# EAGLE board Board (EAGLE 9.6.2)
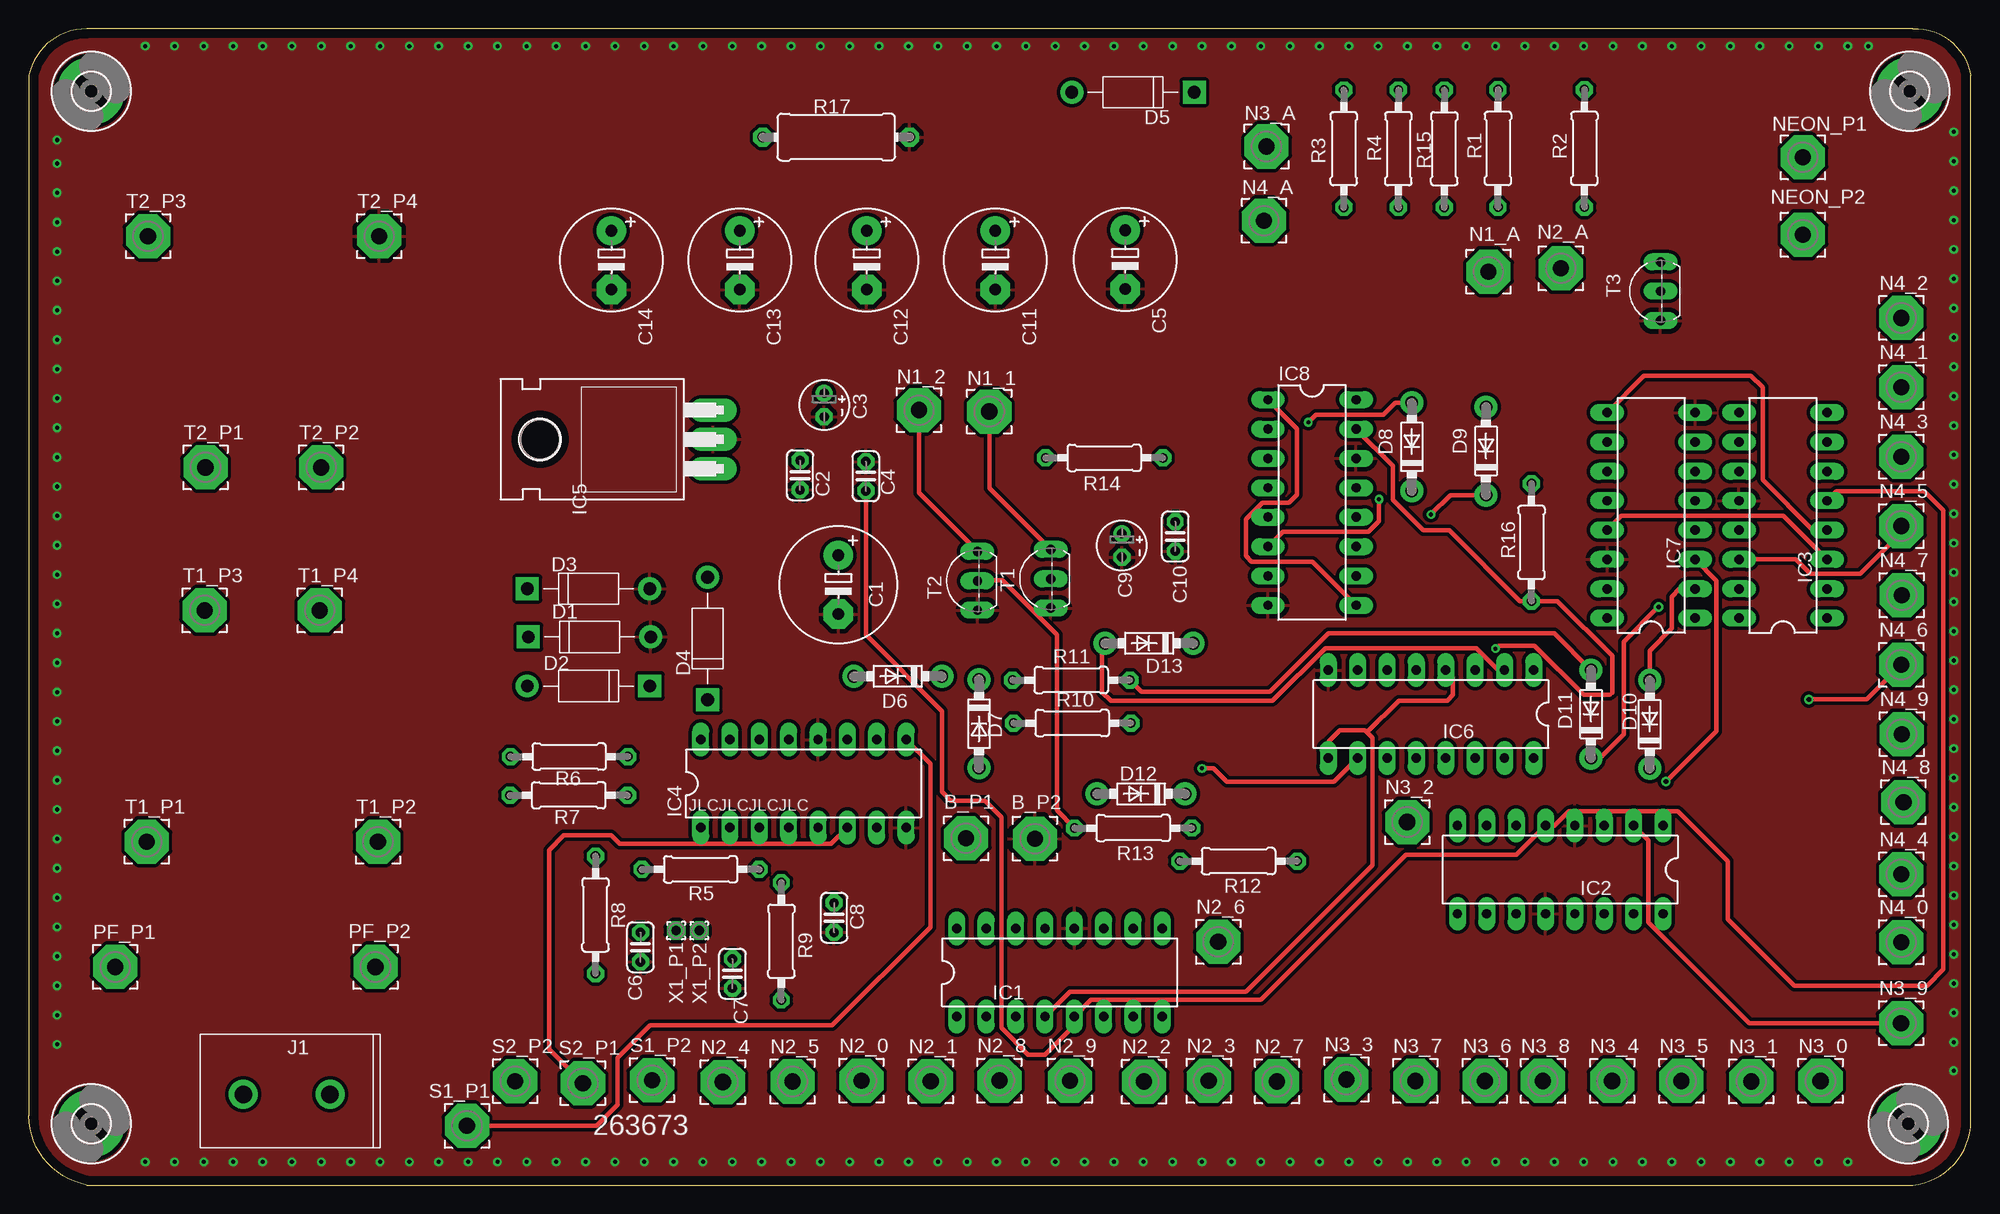
[diagram p0: board, top side]
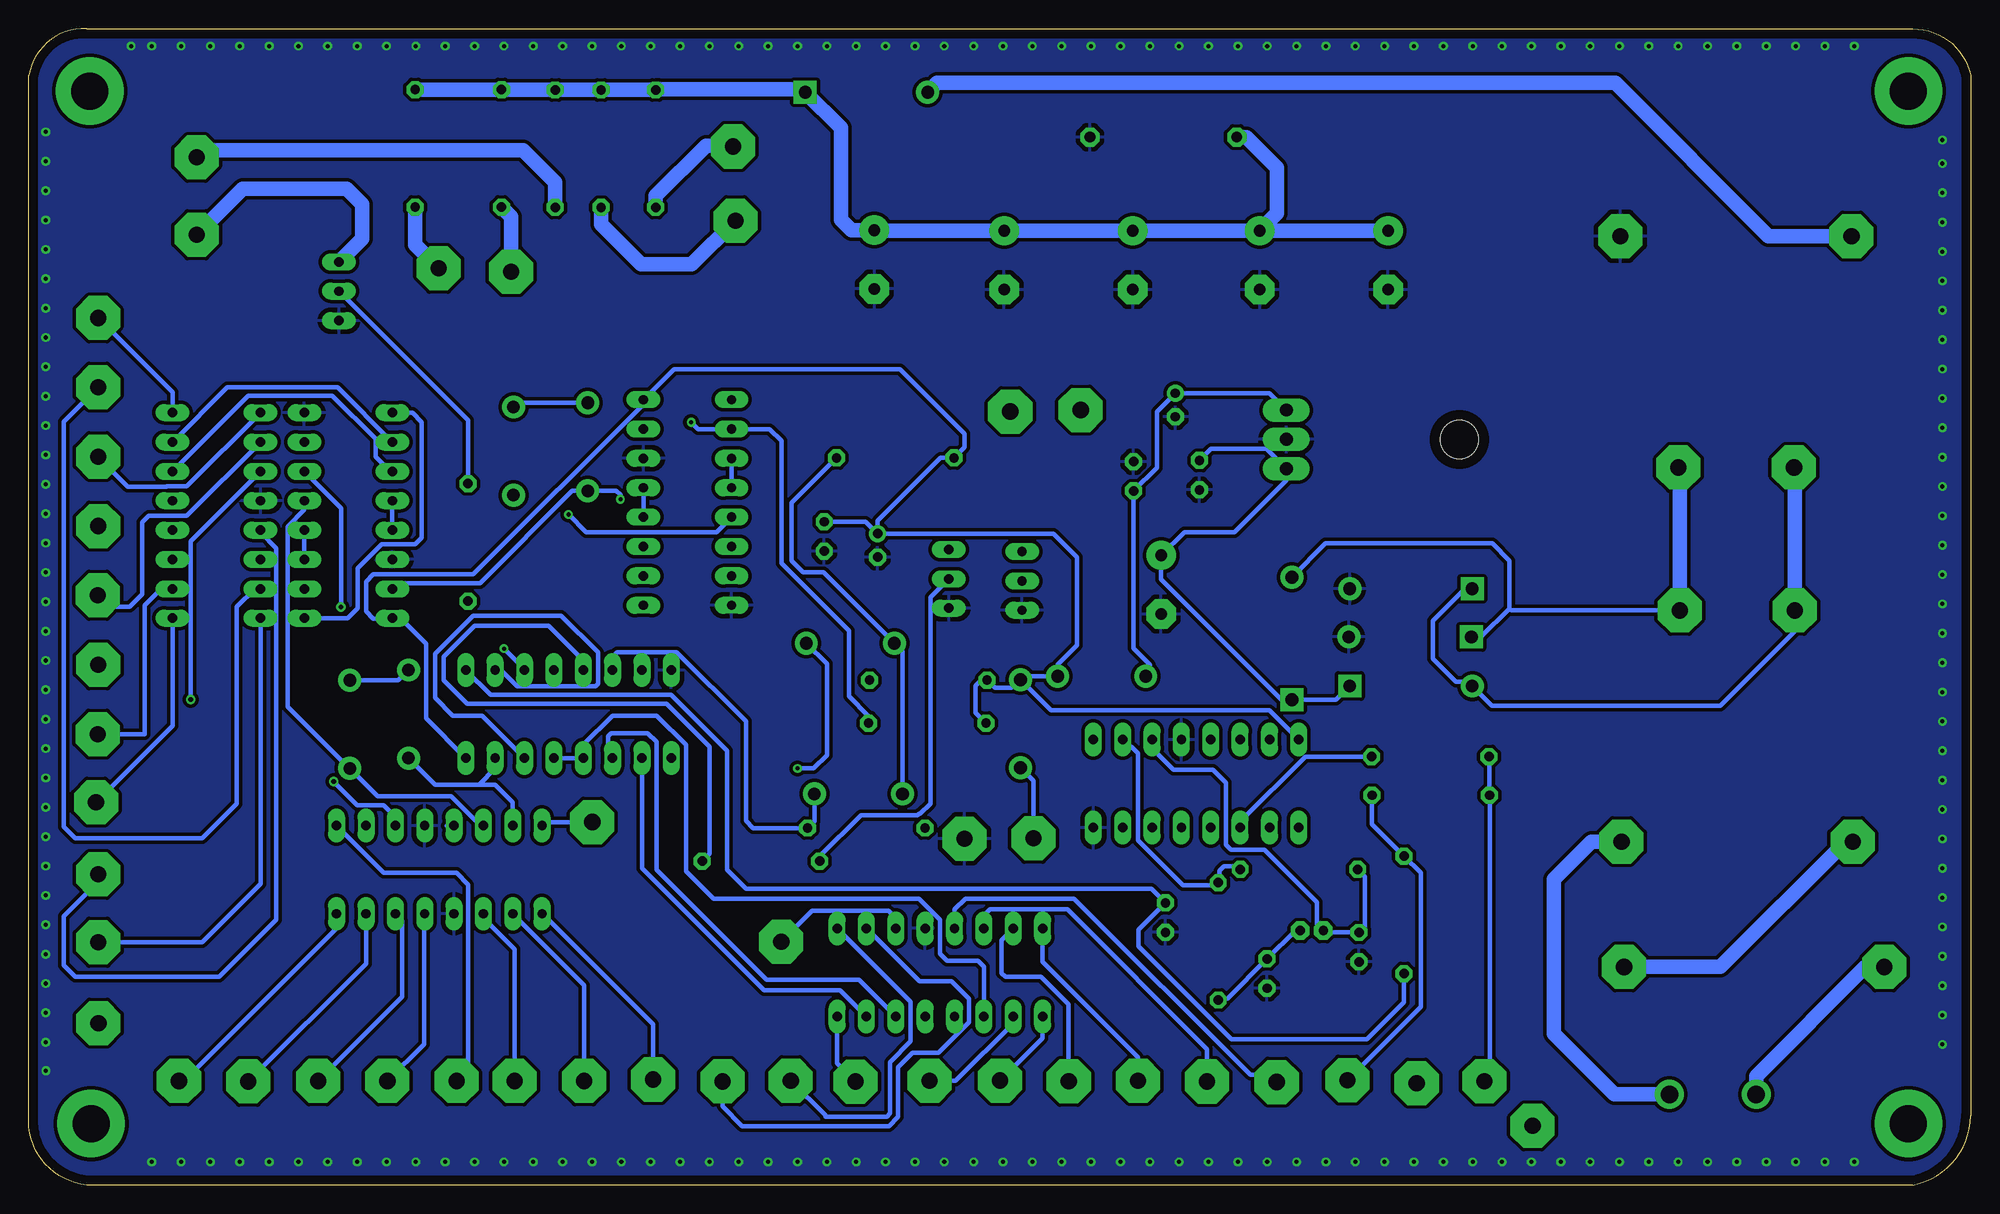
[diagram p1: board, bottom side, seen from below]

Size 168 x 100 mm. Coordinates in mm from the lower left corner, seen from the top.
Outline: 5,0 163,0 arc79 168,5 168,96 arc84 163,100 5,100 arc79 0,96 0,6 arc79 5,0
Copper layers (1*16): Top 0.035mm / dielectric 1.5mm / Bottom 0.035mm
Design rules "default *": minimum track width 16mil, minimum drill 0.35mm, track to track 12mil, track to pad 12mil, pad to pad 12mil, via to via 12mil, smd to smd 6mil, copper to edge 32mil, drill to drill 6mil, minimum pad ring 10mil, minimum via ring 8mil, stop-mask expansion 4mil, vias tented up to drill 0mil, thermal gap 16mil
Net classes: 1 HV: clearance 2 mm

## Footprints (pad centres in the part's own frame; a part is rotated, then mirrored left to right if it is on the bottom)
3,81/1,4 = drill 1.397 pad 3.81 octagon: 1 0,0
E5-10,5 = drill 1.016 pad 2.54: + -2.54,0 | drill 1.016 pad 2.54 octagon: - 2.54,0
C025-024X044 = drill 0.813 octagon: 1 -1.27,0; 2 1.27,0
E2-4 = drill 0.813 pad 1.27: + -1.016,0 | drill 0.813 pad 1.27 octagon: - 1.016,0
E5-8,5 = drill 1.016 pad 2.54: + -2.54,0 | drill 1.016 pad 2.54 octagon: - 2.54,0
DIOAD1060W80L520D270 = drill 1.1 pad 1.65: A 5.3,0 | drill 1.1 pad 1.65 square: C -5.3,0
DO41-7.6 = drill 1.1 pad 1.7: A 3.81,0; C -3.81,0
3,2-PAD = drill 3.2 pad 5.842: B3,2 0,0
DIL16 = drill 0.813 long: 1 -8.89,-3.81; 2 -6.35,-3.81; 3 -3.81,-3.81; 4 -1.27,-3.81; 5 1.27,-3.81; 6 3.81,-3.81; 7 6.35,-3.81; 8 8.89,-3.81; 9 8.89,3.81; 10 6.35,3.81; 11 3.81,3.81; 12 1.27,3.81; 13 -1.27,3.81; 14 -3.81,3.81; 15 -6.35,3.81; 16 -8.89,3.81
TO220H = drill 1.118 long: 1 -2.54,-10.16; 2 0,-10.16; 3 2.54,-10.16 | hole 3.302: 0,4.826
691216910002 = drill 1.5: 1 -3.75,0; 2 3.75,0
0207/10 = drill 0.813 octagon: 1 -5.08,0; 2 5.08,0
0411/12 = drill 0.914 octagon: 1 -6.35,0; 2 6.35,0
TO92-EBC = drill 0.813 long: B 0,-1.27; C 2.54,-1.27; E -2.54,-1.27
1,6/0,8 = drill 0.813 pad 1.6 octagon: 1 0,0

## Placement (x,y rotation side)
B_P1  [3,81/1,4]  81.09,29.99 0 top
B_P2  [3,81/1,4]  87.05,29.96 0 top
C1  680u/35V  [E5-10,5]  70.03,51.93 270 top
C2  100n/35V  [C025-024X044]  66.72,61.41 270 top
C3  100u  [E2-4]  68.81,67.47 270 top
C4  100n  [C025-024X044]  72.42,61.31 90 top
C5  4.7u/450V  [E5-8,5]  94.85,80.05 270 top
C6  18p  [C025-024X044]  52.91,20.57 270 top
C7  18p  [C025-024X044]  60.88,18.29 270 top
C8  1n  [C025-024X044]  69.66,23.13 270 top
C9  100u  [E2-4]  94.56,55.33 270 top
C10  100n  [C025-024X044]  99.18,56.1 270 top
C11  4.7u/450V  [E5-8,5]  83.62,80 270 top
C12  4.7u/450V  [E5-8,5]  72.49,80 270 top
C13  4.7u/450V  [E5-8,5]  61.51,80 270 top
C14  4.7u/450V  [E5-8,5]  50.4,80 270 top
D1  1N4007  [DIOAD1060W80L520D270]  48.5,47.41 0 top
D2  1N4007  [DIOAD1060W80L520D270]  48.42,43.16 180 top
D3  1N4007  [DIOAD1060W80L520D270]  48.42,51.57 0 top
D4  1N4007  [DIOAD1060W80L520D270]  58.73,47.28 90 top
D5  1N4007  [DIOAD1060W80L520D270]  95.53,94.52 180 top
D6  1N5819  [DO41-7.6]  75.18,44 180 top
D7  1N5819  [DO41-7.6]  82.2,39.9 270 top
D8  1N5819  [DO41-7.6]  119.65,63.85 90 top
D9  1N5819  [DO41-7.6]  126.07,63.49 90 top
D10  1N5819  [DO41-7.6]  140.24,39.85 90 top
D11  1N5819  [DO41-7.6]  135.16,40.73 90 top
D12  1N5819  [DO41-7.6]  96.23,33.83 180 top
D13  1N5819  [DO41-7.6]  96.93,46.85 180 top
H1  3.2  [3,2-PAD]  5.38,94.62 0 top
H2  3.2  [3,2-PAD]  162.74,94.62 0 top
H3  3.2  [3,2-PAD]  162.61,5.3 0 top
H4  3.2  [3,2-PAD]  5.38,5.3 0 top
IC1  74141N  [DIL16]  89.18,18.38 0 top
IC2  74141N  [DIL16]  132.49,27.27 180 top
IC3  74141N  [DIL16]  151.76,57.92 90 top
IC4  4060N  [DIL16]  67.01,34.72 0 top
IC5  7805T  [TO220H]  49.05,64.5 90 top
IC6  74HC390N  [DIL16]  121.31,40.73 180 top
IC7  74HC390N  [DIL16]  140.36,57.92 90 top
IC8  74HC390N  [DIL16]  111.01,59.04 270 top
J1  [691216910002]  22.3,7.84 0 top
N1_1  [3,81/1,4]  83.09,66.91 0 top
N1_2  [3,81/1,4]  77,67.03 0 top
N1_A  [3,81/1,4]  126.28,79.01 0 top
N2_0  [3,81/1,4]  72.03,9.03 0 top
N2_1  [3,81/1,4]  78.03,8.97 0 top
N2_2  [3,81/1,4]  96.49,8.95 0 top
N2_3  [3,81/1,4]  102.08,9.02 0 top
N2_4  [3,81/1,4]  60.04,8.9 0 top
N2_5  [3,81/1,4]  66.06,8.95 0 top
N2_6  [3,81/1,4]  102.91,21.04 0 top
N2_7  [3,81/1,4]  107.98,8.96 0 top
N2_8  [3,81/1,4]  83.97,9.04 0 top
N2_9  [3,81/1,4]  90.06,9.02 0 top
N2_A  [3,81/1,4]  132.54,79.29 0 top
N3_0  [3,81/1,4]  155.02,9 0 top
N3_1  [3,81/1,4]  149.02,8.96 0 top
N3_2  [3,81/1,4]  119.25,31.4 0 top
N3_3  [3,81/1,4]  114,9.13 0 top
N3_4  [3,81/1,4]  136.98,9 0 top
N3_5  [3,81/1,4]  142.98,9 0 top
N3_6  [3,81/1,4]  125.97,9 0 top
N3_7  [3,81/1,4]  119.95,9 0 top
N3_8  [3,81/1,4]  131,9 0 top
N3_9  [3,81/1,4]  161.98,14 0 top
N3_A  [3,81/1,4]  107.08,89.83 0 top
N4_0  [3,81/1,4]  162,21 0 top
N4_1  [3,81/1,4]  162.02,69.02 0 top
N4_2  [3,81/1,4]  162.02,75 0 top
N4_3  [3,81/1,4]  162.02,63 0 top
N4_4  [3,81/1,4]  162.02,26.87 0 top
N4_5  [3,81/1,4]  162,57 0 top
N4_6  [3,81/1,4]  162,45 0 top
N4_7  [3,81/1,4]  162.03,51.02 0 top
N4_8  [3,81/1,4]  162.19,33.11 0 top
N4_9  [3,81/1,4]  162.05,39 0 top
N4_A  [3,81/1,4]  106.87,83.41 0 top
NEON_P1  [3,81/1,4]  153.49,88.9 0 top
NEON_P2  [3,81/1,4]  153.49,82.2 0 top
PF_P1  [3,81/1,4]  7.46,18.86 0 top
PF_P2  [3,81/1,4]  29.98,18.86 0 top
R1  82k/1W  [0207/10]  127.11,89.67 90 top
R2  82k/1W  [0207/10]  134.58,89.67 90 top
R3  82k/1W  [0207/10]  113.76,89.64 90 top
R4  82k/1W  [0207/10]  118.49,89.64 90 top
R5  10M  [0207/10]  58.11,27.31 180 top
R6  10k  [0207/10]  46.74,37.06 180 top
R7  10k  [0207/10]  46.7,33.71 0 top
R8  1k  [0207/10]  49.02,23.37 270 top
R9  100k  [0207/10]  65.1,21.08 270 top
R10  470k  [0207/10]  90.27,39.96 180 top
R11  470k  [0207/10]  90.18,43.67 180 top
R12  13k  [0207/10]  104.66,28.02 180 top
R13  13k  [0207/10]  95.55,30.88 180 top
R14  470k  [0207/10]  93.04,62.9 180 top
R15  470k/1W  [0207/10]  122.46,89.64 270 top
R16  48.7k  [0207/10]  130,55.59 90 top
R17  82k/3W  [0411/12]  69.85,90.64 180 top
S1_P1  [3,81/1,4]  37.9,5.11 0 top
S1_P2  [3,81/1,4]  53.92,9.07 0 top
S2_P1  [3,81/1,4]  47.93,8.81 0 top
S2_P2  [3,81/1,4]  42.07,8.99 0 top
T1  MPSA42  [TO92-EBC]  87.13,52.44 90 top
T1_P1  [3,81/1,4]  10.2,29.7 0 top
T1_P2  [3,81/1,4]  30.2,29.7 0 top
T1_P3  [3,81/1,4]  15.2,49.7 0 top
T1_P4  [3,81/1,4]  25.16,49.7 0 top
T2  MPSA42  [TO92-EBC]  80.8,52.26 90 top
T2_P1  [3,81/1,4]  15.28,62.07 0 top
T2_P2  [3,81/1,4]  25.28,62.07 0 top
T2_P3  [3,81/1,4]  10.3,82.08 0 top
T2_P4  [3,81/1,4]  30.31,82.08 0 top
T3  MPSA42  [TO92-EBC]  139.91,77.31 90 top
X1_P1  [1,6/0,8]  56,22 0 top
X1_P2  [1,6/0,8]  58,22 0 top

## Library data of the parts
B_P1 B_P2 N1_1 N1_2 N1_A N2_0 N2_1-N2_9 N2_A N3_0 N3_1-N3_9 N3_A N4_0 N4_1-N4_9 N4_A NEON_P1 NEON_P2 PF_P1 PF_P2 S1_P1 S1_P2 S2_P1 S2_P2 T1_P1-T1_P4 T2_P1-T2_P4 X1_P1 X1_P2 = wirepad
C1-C14 = rcl; SPICEPREFIX: C
D1-D5 = 1N4007; AVAILABILITY: In Stock; DESCRIPTION: Diode Standard 1000 V 1A Through Hole DO-41/DO-204AC; MF: Diotec Semiconductor; MP: 1N4007; PACKAGE: DO-41-2 Diotec; PRICE: None; PURCHASE-URL: https://pricing.snapeda.com/search/part/1N4007/?ref=eda
D6-D13 = diode
H1-H4 = holes
IC1-IC3 = 74xx-us
IC4 = 40xx
IC5 = linear
IC6-IC8 = 74xx-eu
J1 = ak750; AVAILABILITY: In Stock; DESCRIPTION: 2 Position Wire to Board Terminal Block Horizontal with Board 0.295 (7.50mm) Through Hole; MF: Wurth Electronics; MP: 691216910002; PACKAGE: None; PRICE: None
R1-R17 = rcl; SPICEPREFIX: R
T1-T3 = transistor

## Nets
0_1: IC1.16 N2_0.1
0_2: IC2.16 N3_0.1
0_3: IC3.16 N4_0.1
A1: C8.1 IC6.1 R8.2
IC1_P3: IC1.3 IC6.12 IC6.13
IC1_P4: IC1.4 IC6.4 IC6.9
IC1_P6: IC1.6 IC6.11
IC1_P7: D13.C IC1.7 IC6.10
IC2_P3: IC2.3 IC7.3 IC7.4
IC2_P6: D10.C IC2.6 IC7.5
IC2_P7: D11.C IC2.7 IC6.15 IC7.6
IC3_P3: IC3.3 IC7.12 IC7.13
IC3_P4: IC3.4 IC7.1 IC7.9
IC3_P6: IC3.6 IC7.11
IC3_P7: IC3.7 IC7.10
IC4_P10: IC4.10 R5.1 R9.1
IC4_P11: C6.1 IC4.11 R5.2 X1_P1.1
IC6_P3: IC6.3 IC8.15 R16.1
IC8_P3: IC8.3 IC8.4
IC8_P9: IC8.1 IC8.9
IC8_P13: IC8.12 IC8.13
MGND: B_P2.1 C1.- C2.2 C3.- C4.2 C5.- C6.2 C7.2 C8.2 C9.- C10.2 C11.- C12.- C13.- C14.- D1.A D3.A IC1.12 IC2.4 IC2.12 IC3.12 IC4.8 IC4.12 IC5.2 IC6.8 IC7.8 IC7.14 IC8.8 IC8.14 R17.1 T1.E T2.E T2_P4.1 T3.E
N$1 [HV]: J1.1 PF_P1.1
N$2 [HV]: J1.2 T1_P2.1
N$3 [HV]: D5.A T2_P3.1
N$4 [HV]: C5.+ C11.+ C12.+ C13.+ C14.+ D5.C R1.2 R2.2 R3.2 R4.2 R15.1 R17.2
N$5 [HV]: N2_A.1 R2.1
N$6 [HV]: N3_A.1 R3.1
N$7 [HV]: N4_A.1 R4.1
N$8 [HV]: N1_A.1 R1.1
N$9: IC4.9 S1_P1.1
N$10: IC4.6 S2_P1.1
N$11: IC4.3 R6.1
N$12: R6.2 R7.1 S2_P2.1
N$13: R7.2 R8.1 S1_P2.1
N$14: D12.A D13.A IC6.2 IC6.14 R14.1
N$15: IC1.15 N2_1.1
N$16: C1.+ C2.1 D2.C D4.C IC5.1
N$17: B_P1.1 D7.A
N$18: IC1.8 N2_2.1
N$19: IC1.9 N2_3.1
N$20: IC1.13 N2_4.1
N$21: IC1.14 N2_5.1
N$22: IC1.11 N2_6.1
N$23: IC1.10 N2_7.1
N$24: IC1.1 N2_8.1
N$25: IC1.2 N2_9.1
N$26: IC2.15 N3_1.1
N$27: IC2.8 N3_2.1
N$28: IC2.9 N3_3.1
N$29: IC2.13 N3_4.1
N$30: IC2.14 N3_5.1
N$31: IC2.11 N3_6.1
N$32: IC2.10 N3_7.1
N$33: IC2.1 N3_8.1
N$34: IC2.2 N3_9.1
N$35: IC3.15 N4_1.1
N$36: IC3.8 N4_2.1
N$37: IC3.9 N4_3.1
N$38: IC3.13 N4_4.1
N$39: IC3.14 N4_5.1
N$40: IC3.11 N4_6.1
N$41: IC3.10 N4_7.1
N$42: IC3.1 N4_8.1
N$43: IC3.2 N4_9.1
N$44: C7.1 R9.2 X1_P2.1
N$45: R13.2 T2.B
N$46: D8.A D9.A IC8.2 R10.1
N$47: D8.C IC7.15 IC8.6
N$48: D9.C IC8.5
N$49: D10.A D11.A IC7.2 R11.1
N$50: N1_1.1 T1.C
N$51: N1_2.1 T2.C
N$52 [HV]: NEON_P1.1 R15.2
N$53 [HV]: NEON_P2.1 T3.C
N$54: R16.2 T3.B
N$55: R12.2 T1.B
N$56 [HV]: PF_P2.1 T1_P1.1
T1_B: D12.C IC6.6 R13.1
T2_B: IC6.5 R12.1
VCC74: C3.+ C4.1 D6.A IC1.5 IC2.5 IC3.5 IC5.3
VCCS: C9.+ C10.1 D6.C D7.C IC4.16 IC6.16 IC7.16 IC8.16 R10.2 R11.2 R14.2
VG1 [HV]: D1.C D4.A T1_P4.1 T2_P2.1
VG2 [HV]: D2.A D3.C T1_P3.1 T2_P1.1

## Tracks (layer width: path | path; a pad name or v marks a point on that pad's centre or on a via)
0_1
  Bottom 0.406: IC1.16 80.29,19.3 72.03,11.04 N2_0.1
0_2
  Bottom 0.406: IC2.16 141.38,22.19 154.57,9 N3_0.1
0_3
  Bottom 0.406: IC3.16 147.95,26.05 153,21 N4_0.1
A1
  Bottom 0.406: IC6.1 128.04,42.39 112.42,42.39 107.6,37.56 107.6,27.29 105.93,25.62 70.89,25.62 C8.1 72,22.06 72,20.65 63.96,12.61 52.22,12.61 49.02,15.81 R8.2
IC1_P3
  Bottom 0.406: IC6.13 IC6.12 120.04,38.07 117.5,40.61 113.69,40.61 111.15,38.07 111.15,27.15 108.76,24.76 90.99,24.76 89.18,22.95 89.18,20 88.58,19.4 85.88,19.4 85.37,18.89 IC1.3
IC1_P4
  Top 0.406: IC1.4 90.07,16.73 105.29,16.73 116.23,27.67 116.23,38.7 115.79,39.15 | 115.79,39.15 115.6,39.34 113.44,39.34 112.42,38.32 IC6.9 | 115.79,39.15 118.52,41.88 122.71,41.88 123.22,42.39 123.22,43.91 IC6.4
IC1_P6
  Bottom 0.406: IC6.11 117.88,37.31 117.88,38.83 117.63,39.08 114.45,39.08 113.69,38.32 113.69,27.27 104.17,17.75 96.17,17.75 IC1.6
IC1_P7  (via drill 0.35)
  Top 0.406: v101.5,36.04 102.5,36.04 103.65,34.89 112.93,34.89 IC6.10
  Bottom 0.406: IC1.7 97.82,16.86 104.41,16.86 114.96,27.42 IC6.10 | v101.5,36.04 100.1,36.04 98.96,37.18 98.96,45.07 D13.C
IC2_P3  (via drill 0.4)
  Top 0.406: v141.63,34.89 146,39.26 146,52.28 IC7.3
  Bottom 0.406: IC2.3 136.3,31.84 137.31,32.86 139.6,32.86 v141.63,34.89 | IC7.3 IC7.4
IC2_P6
  Bottom 0.406: IC2.6 128.93,31.08 131.47,33.62 137.82,33.62 D10.C | D10.C 140.27,36 | IC7.5 144.17,58.4 145.62,56.95 145.62,41.37 140.54,36.29 140.54,36.34 D10.C
IC2_P7  (via drill 0.4)
  Top 0.406: v141,50 138,47 138,39 135.93,36.92 D11.C
  Bottom 0.406: D11.C 132.87,34.64 129.06,34.64 | 129.06,34.64 127.66,36.04 IC6.15 | 129.06,34.64 127.66,34.64 126.14,33.11 IC2.7 | IC7.6 141,58.56 v141,50
IC3_P3
  Top 0.406: IC3.3 151.79,57.89 143.66,57.89 143.65,57.88 137.78,57.88 IC7.13
  Bottom 0.406: IC7.13 IC7.12
IC3_P4
  Top 0.406: IC7.9 139.74,70 149,70 150,69 150,61 154.35,56.65 IC3.4
  Bottom 0.406: IC7.9 134.81,66.81 134,66 134,55.99 134.58,55.41 137.5,55.41 139.55,53.36 139.55,49.88 140.4,49.03 IC7.1
IC3_P6
  Bottom 0.406: IC3.6 149.01,68.29 141.75,68.29 138,64.53 138,63 136.73,61.73 IC7.11
IC3_P7
  Bottom 0.406: IC3.7 150.84,69 141.28,69 IC7.10
IC4_P10
  Bottom 0.406: R5.1 63.44,27.55 64.59,27.55 64.97,27.17 64.97,26.29 R9.1 65.34,25.93 68.16,25.93 72.06,29.82 72.06,37.34 73.25,38.53 IC4.10
IC4_P11
  Bottom 0.406: R5.2 52.4,26.67 52.4,22.35 C6.1 55.84,21.84 X1_P1.1 56.54,22.54 56.54,23.49 56.55,23.5 56.55,24.47 61.08,29 64,29 64.44,29.44 64.44,34.79 65.58,35.92 68.98,35.92 70.82,37.77 IC4.11
IC6_P3  (via drill 0.35)
  Top 0.406: v126.9,46.4 126.95,46.4 127.18,46.63 130.27,46.63 134.52,42.39 136.81,42.39 136.98,42.56 136.98,45.78 132.25,50.51 R16.1 129,50.51 122.89,56.62 120.65,56.62 118,59.27 118,62.21 IC8.15
  Bottom 0.406: IC6.3 125.12,44.62 v126.9,46.4
IC8_P3
  Bottom 0.406: IC8.4 IC8.3
IC8_P9
  Top 0.406: IC8.1 109.71,65.42 109.71,59.72 109.03,59.04 106.72,59.04 105.28,57.6 105.28,54.42 105.78,53.93 107.72,53.93 107.72,53.92 111.05,53.92 IC8.9
IC8_P13
  Bottom 0.406: IC8.12 IC8.13
MGND  (via drill 0.35)
  other vias: 2.44,88.36 2.44,85.82 2.44,83.28 2.44,80.74 2.44,78.2 2.44,75.66 2.44,73.12 2.44,70.58 2.44,68.04 2.44,65.5 2.44,62.96 2.44,60.42 2.44,57.88 2.44,55.34 2.44,52.8 2.44,50.26 2.44,47.72 2.44,45.18 2.44,42.64 2.44,40.1 2.44,37.56 2.44,35.02 2.44,32.48 2.44,29.94 2.44,27.4 2.44,24.86 2.44,22.32 2.44,19.78 2.44,17.24 2.44,14.7 2.44,12.16 10.06,2 12.6,2 15.14,2 17.68,2 20.22,2 22.76,2 25.3,2 27.84,2 30.38,2 32.92,2 35.46,2 38,2 40.54,2 43.08,2 45.62,2 48.16,2 50.7,2 53.24,2 55.78,2 58.32,2 60.86,2 63.4,2 65.94,2 68.48,2 71.02,2 73.56,2 76.1,2 78.64,2 81.18,2 83.72,2 86.26,2 88.8,2 91.34,2 93.88,2 96.42,2 98.96,2 101.5,2 104.04,2 106.58,2 109.12,2 111.66,2 114.2,2 116.74,2 119.28,2 121.82,2 124.36,2 126.9,2 129.44,2 131.98,2 134.52,2 137.06,2 139.6,2 142.14,2 144.68,2 147.22,2 149.76,2 152.3,2 154.84,2 157.38,2 166.54,12.35 166.54,14.89 166.54,17.43 166.54,19.97 166.54,22.51 166.54,25.05 166.54,27.59 166.54,30.13 166.54,32.67 166.54,35.21 166.54,37.75 166.54,40.29 166.54,42.83 166.54,45.37 166.54,47.91 166.54,50.45 166.54,52.99 166.54,55.53 166.54,58.07 166.54,60.61 166.54,63.15 166.54,65.69 166.54,68.23 166.54,70.77 166.54,73.31 166.54,75.85 166.54,78.39 166.54,80.93 166.54,83.47 166.54,86.01 166.54,88.55 157.38,98.52 154.84,98.52 152.3,98.52 149.76,98.52 147.22,98.52 144.68,98.52 142.14,98.52 139.6,98.52 137.06,98.52 134.52,98.52 131.98,98.52 129.44,98.52 126.9,98.52 124.36,98.52 121.82,98.52 119.28,98.52 116.74,98.52 114.2,98.52 111.66,98.52 109.12,98.52 106.58,98.52 104.04,98.52 101.5,98.52 98.96,98.52 96.42,98.52 93.88,98.52 91.34,98.52 88.8,98.52 86.26,98.52 83.72,98.52 81.18,98.52 78.64,98.52 76.1,98.52 73.56,98.52 71.02,98.52 68.48,98.52 65.94,98.52 63.4,98.52 60.86,98.52 58.32,98.52 55.78,98.52 53.24,98.52 50.7,98.52 48.16,98.52 45.62,98.52 43.08,98.52 40.54,98.52 38,98.52 35.46,98.52 32.92,98.52 30.38,98.52 27.84,98.52 25.3,98.52 22.76,98.52 20.22,98.52 17.68,98.52 15.14,98.52 12.6,98.52 10.06,98.52 2.44,90.39 166.54,91.09 166.52,9.87 159.16,98.52
  pour Bottom: 192.94,-0.54 192.94,103.6 -2.64,103.6 -2.64,-3.08 192.94,-3.08
  pour Top: 192.94,-0.54 192.94,103.6 -2.64,103.6 -2.64,-3.08 192.94,-3.08
N$1
  Bottom 1.27: PF_P1.1 9.12,18.86 18.55,9.43 J1.1
N$2
  Bottom 1.27: J1.2 30.84,7.84 36.06,13.06 36.06,26.46 32.83,29.7 T1_P2.1
N$3
  Bottom 1.27: D5.A 90.12,94.63 90.11,94.63 89.41,95.33 30.74,95.33 17.49,82.08 T2_P3.1
N$4
  Bottom 1.27: R3.2 113.66,94.82 | R3.2 R4.2 R15.1 127.08,94.72 R1.2 R2.2 | R3.2 113.71,94.77 101.09,94.77 D5.C 97.75,91.43 97.75,83.51 96.83,82.59 C5.+ 94.8,82.54 C11.+ C12.+ C13.+ | C14.+ C13.+ | C13.+ 60,84.05 60,88 62.64,90.64 R17.2
N$5
  Bottom 1.27: N2_A.1 134.58,81.34 R2.1
N$6
  Bottom 1.27: R3.1 113.76,85.56 109.43,89.89 107.14,89.89 N3_A.1
N$7
  Bottom 1.27: N4_A.1 110.65,79.63 115.03,79.63 118.49,83.1 R4.1
N$8
  Bottom 1.27: R1.1 126.28,83.77 N1_A.1
N$9
  Top 0.406: IC4.9 78,36.43 78,22.32 69.5,13.81 53.75,13.81 50.95,11.02 50.95,6.95 49.12,5.11 S1_P1.1
N$10
  Top 0.406: IC4.6 69.42,29.51 51.13,29.51 50.39,30.24 46.28,30.24 45,28.96 45,11.74 S2_P1.1
N$11
  Bottom 0.406: IC4.3 63.2,31.42 57.56,37.06 R6.1
N$12
  Bottom 0.406: S2_P2.1 41.6,9.46 41.6,33.7 R7.1 41.62,37.02 R6.2
N$13
  Bottom 0.406: S1_P2.1 47.58,15.4 47.58,27.01 R8.1 51.78,31.22 R7.2
N$14
  Top 0.406: IC6.2 127.15,44.55 125.25,46.45 112.16,46.45 107.58,41.88 93.63,41.88 92.86,42.64 92.86,46.6 D13.A
  Bottom 0.406: 98.12,62.84 R14.1 101,60.02 101,60 102,59 102,54 101,53 99.27,53 D13.A 92.42,46.15 D12.A | IC6.2 127.15,44.55 125.76,43.16 118.96,43.16 118.77,43.35 118.77,46.07 121.95,49.24 129.57,49.24 132.87,45.94 132.87,42.13 131.34,40.61 128.81,40.61 IC6.14
N$15
  Bottom 0.406: IC1.15 83.83,21.19 83.83,18.32 83.51,18 80.42,18 78.03,15.62 N2_1.1
N$16
  Bottom 0.406: D2.C 53.75,43.16 54.93,41.98 D4.C 59.62,41.98 70.03,52.4 C1.+ 68.03,56.47 63.7,56.47 59.21,60.96 IC5.1 60.93,63.67 65.72,63.67 C2.1
N$17
  Bottom 0.406: B_P1.1 81.09,34.97 D7.A
N$18
  Bottom 0.406: N2_2.1 98.07,10.53 IC1.8
N$19
  Bottom 0.406: IC1.9 91.72,15.84 91.72,12.41 93.5,10.64 93.5,6.19 93.77,5.92 99.08,5.92 99.08,6.02 N2_3.1
N$20
  Bottom 0.406: N2_4.1 60.68,9.54 62.33,9.54 77.57,24.78 86.97,24.78 87.91,23.84 IC1.13
N$21
  Bottom 0.406: IC1.14 85.37,23.34 84.86,23.84 78.16,23.84 66.06,11.75 N2_5.1
N$22
  Bottom 0.406: IC1.11 92.99,23.08 93.63,23.72 100.22,23.72 N2_6.1
N$23
  Bottom 0.406: IC1.10 90.96,17.62 88.16,17.62 86.67,16.13 86.67,14.06 89.3,11.43 91.56,11.43 92.79,10.2 92.79,5.9 93.59,5.1 106.29,5.1 107.98,6.8 N2_7.1
N$24
  Bottom 0.406: N2_8.1 80.29,12.71 IC1.1
N$25
  Bottom 0.406: N2_9.1 87.81,9.02 82.83,14 IC1.2
N$26
  Bottom 0.406: IC2.15 138.84,19.14 N3_1.1
N$27
  Bottom 0.406: IC2.8 123.28,31.4 N3_2.1
N$28
  Bottom 0.406: IC2.9 123.54,23.46 114,13.92 N3_3.1
N$29
  Bottom 0.406: IC2.13 133.81,23.41 133.81,12.18 N3_4.1
N$30
  Bottom 0.406: IC2.14 135.7,22.86 135.7,16.29 N3_5.1
N$31
  Bottom 0.406: IC2.11 128.68,23.1 125.97,20.39 N3_6.1
N$32
  Bottom 0.406: IC2.10 119.95,17.28 N3_7.1
N$33
  Bottom 0.406: IC2.1 137.3,27 131,27 129.98,25.98 129.98,22.95 130,22.93 130,10 N3_8.1
N$34
  Top 0.406: N3_9.1 148.86,14 140.11,22.75 140.11,29.81 IC2.2
N$35
  Bottom 0.406: N4_1.1 164.52,66.52 164.75,66.29 165,66.03 165,31 164,30 153,30 150,33 150,50 148.43,51.57 IC3.15
N$36
  Bottom 0.406: N4_2.1 155.57,68.55 IC3.8
N$37
  Bottom 0.406: IC3.9 154.33,60.43 156.08,60.43 156.09,60.42 159.44,60.42 N4_3.1
N$38
  Bottom 0.406: IC3.13 147.95,56.45 146.58,55.09 146.58,22.95 151.54,18 164,18 165,19 165,23.26 162.02,26.24 N4_4.1
N$39
  Top 0.406: IC3.14 152.89,54.11 154.13,52.87 158.45,52.87 162,56.42 N4_5.1
N$40  (via drill 0.4)
  Top 0.406: N4_6.1 159,42 v154,42
  Bottom 0.406: IC3.11 154,55.68 v154,42
N$41
  Bottom 0.406: IC3.10 154.33,57.89 156.08,57.89 156.09,57.88 157.62,57.88 158.18,57.32 158.18,51.1 159.26,50.02 161.03,50.02 N4_7.1
N$42
  Bottom 0.406: IC3.1 155.57,39.73 N4_8.1
N$43
  Bottom 0.406: IC3.2 156.57,51.57 158,50.14 158,39 N4_9.1
N$44
  Bottom 0.406: R9.2 64.59,16 64.46,16.13 64.31,16.13 C7.1 58.44,22 X1_P2.1
N$45
  Top 0.406: R13.2 88.94,32.4 88.94,47.58 84.23,52.29 82.1,52.29 T2.B
N$46  (via drill 0.35)
  Top 0.406: D8.A 118.22,67.66 117.2,66.64 111.35,66.64 v110.7,65.98
  Bottom 0.406: D8.A 125.7,67.67 D9.A | v110.7,65.98 110.1,65.39 IC8.2 103.93,65.39 102.9,64.36 102.9,53.76 97.06,47.92 97.06,42.26 95.35,40.56 R10.1
N$47  (via drill 0.35)
  Top 0.406: IC8.6 108.49,56.51 115.92,56.51 116.82,57.42 v116.82,59.33
  Bottom 0.406: IC7.15 136.05,52.07 128.97,52.07 121,60.04 D8.C 117.17,60.04 116.82,59.69 v116.82,59.33
N$48  (via drill 0.35)
  Top 0.406: v121.31,58 122.99,59.68 D9.C
  Bottom 0.406: v121.31,58 119.8,56.48 108.49,56.48 IC8.5
N$49
  Top 0.406: D11.A 131.98,47.72 112.42,47.72 107.36,42.66 96.28,42.66 R11.1 | D10.A 140.24,46.23 142.14,48.14 142.14,50.9 142.81,51.57 IC7.2
  Bottom 0.406: D11.A 136.04,43.66 D10.A 140.24,42.89
N$50
  Top 0.406: T1.C 83.09,60.28 N1_1.1
N$51
  Top 0.406: T2.C 77,59.87 N1_2.1
N$52
  Bottom 1.27: R15.2 122.46,86.73 125.23,89.5 152.89,89.5 NEON_P1.1
N$53
  Bottom 1.27: NEON_P2.1 149.49,86.2 140.52,86.2 139.18,84.85 139.18,81.85 T3.C
N$54
  Bottom 0.406: R16.2 130,66.14 T3.B
N$55
  Bottom 0.406: T1.B 90,50.84 90,33 90.88,32.12 90.98,32.12 91.1,32 96,32 99.58,28.42 R12.2
N$56
  Bottom 1.27: PF_P2.1 21.66,18.86 10.82,29.7 T1_P1.1
T1_B
  Bottom 0.406: IC6.6 117.5,45.69 117.09,46.1 111.97,46.1 105.97,40.1 105.97,31.49 105.36,30.88 R13.1 100.04,31.47 D12.C
T2_B
  Bottom 0.406: IC6.5 120.04,45.37 123.03,48.35 129.44,48.35 132.11,45.69 132.11,43.66 130.07,41.62 112.81,41.62 109.1,37.91 109.1,28.65 R12.1
VCC74
  Top 0.406: C4.1 72.42,47.58 79,41 79,34 79.76,33.24 82.7,33.24 84.13,31.82 84.13,13.59 86.45,11.27 87.91,11.27 90.45,13.81 IC1.5 91.9,16.02 106.59,16.02 119.12,28.55 128.69,28.55 IC2.5 132,31.08 133.25,32.32 142.68,32.32 147,28 147,23 152.75,17.25 164.25,17.25 165.65,18.65 165.65,58.35 164,60 156.38,60 IC3.5
  Bottom 0.406: IC5.3 60.66,68.48 C3.+ 70.42,66.88 70.42,62.04 C4.1 72.42,46.42 71,45 71,44.37 D6.A | IC2.5 131.85,31.08
VCCS
  Bottom 0.406: D7.C 81.91,44 D6.C 79,44.01 79,45 77.3,46.7 77.3,54.29 79.34,56.33 93.44,56.33 93.45,56.34 C9.+ | D7.C 82.33,43.83 | C10.1 95.6,57.37 C9.+ | IC6.16 133.63,40.35 133.63,46.83 135.83,49.03 IC7.16 136.59,48.99 138.2,48.99 138.84,49.62 138.84,52.16 138.19,52.81 129.56,52.81 114.82,67.55 IC8.16 112.17,70.58 92.64,70.58 87.05,64.99 87.05,63.81 R14.2 89.13,62.9 94.56,57.47 C9.+ | D7.C 79.55,41.06 60.65,41.06 IC4.16 | R10.2 86.1,40.87 86.1,43.18 85.61,43.67 R11.2 84.43,43 83,43 82.29,43.71 D7.C
VG1
  Bottom 0.406: 39.91,49.87 39.91,54.02 41.38,55.49 55.81,55.49 D4.A | D1.C 42.36,47.41 39.91,49.87 | 39.91,49.87 39.74,49.7 T1_P4.1
  Bottom 1.27: T2_P2.1 25.16,62.07 T1_P4.1
VG2
  Bottom 0.406: D3.C 43.75,51.57 46.5,48.81 46.5,45.5 44.54,43.54 43.5,43.54 D2.A 41.41,41.45 21.67,41.45 15.2,47.91 T1_P3.1
  Bottom 1.27: T2_P1.1 15.2,62.07 T1_P3.1

## Text on the board
tPlace: 263673
tNames: JLCJLCJLCJLC